# Altium PCB ESP8266_Project_PCB.PcbDoc
Units mil, origin at the board's own origin, x right, y up, seen from the top; angles counter-clockwise.
Board outline 6885 x 3273 mil, 2 copper layers (Top Layer, Bottom Layer); 39 components, 24 nets, 249 pads, 0 vias.
Unrouted connection lines stored in the file: 4.
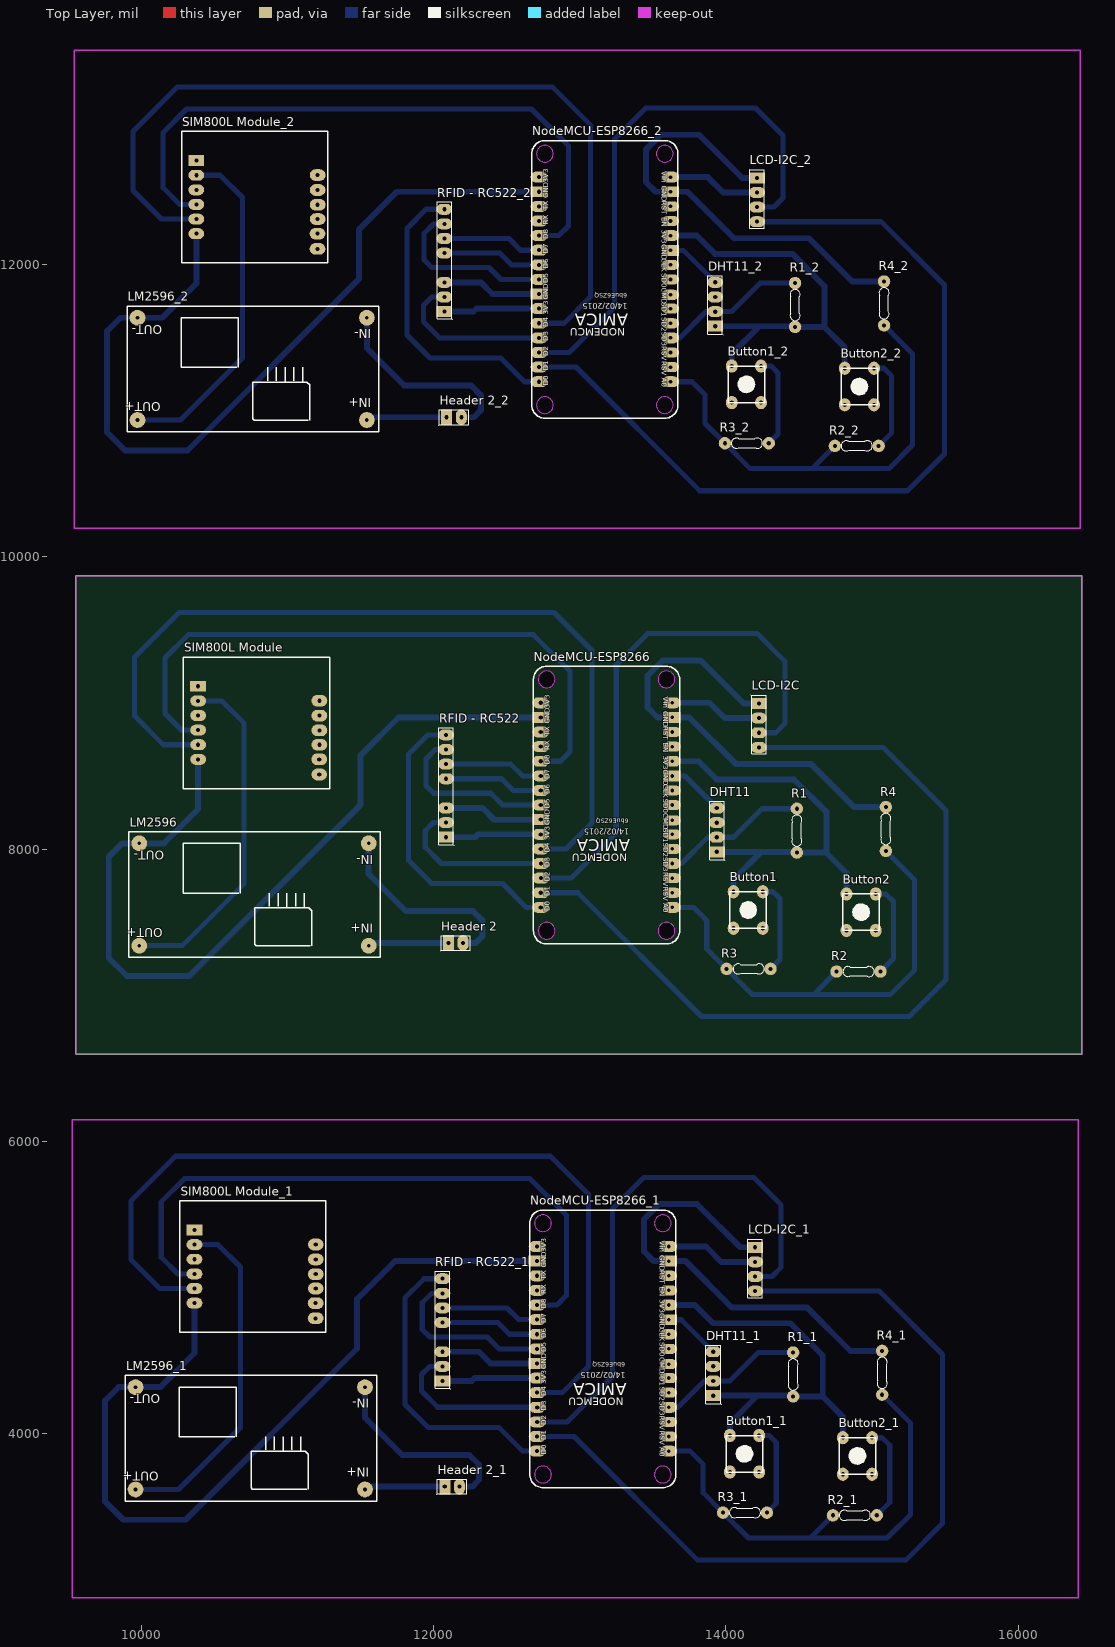
[diagram p0: Top Layer view]
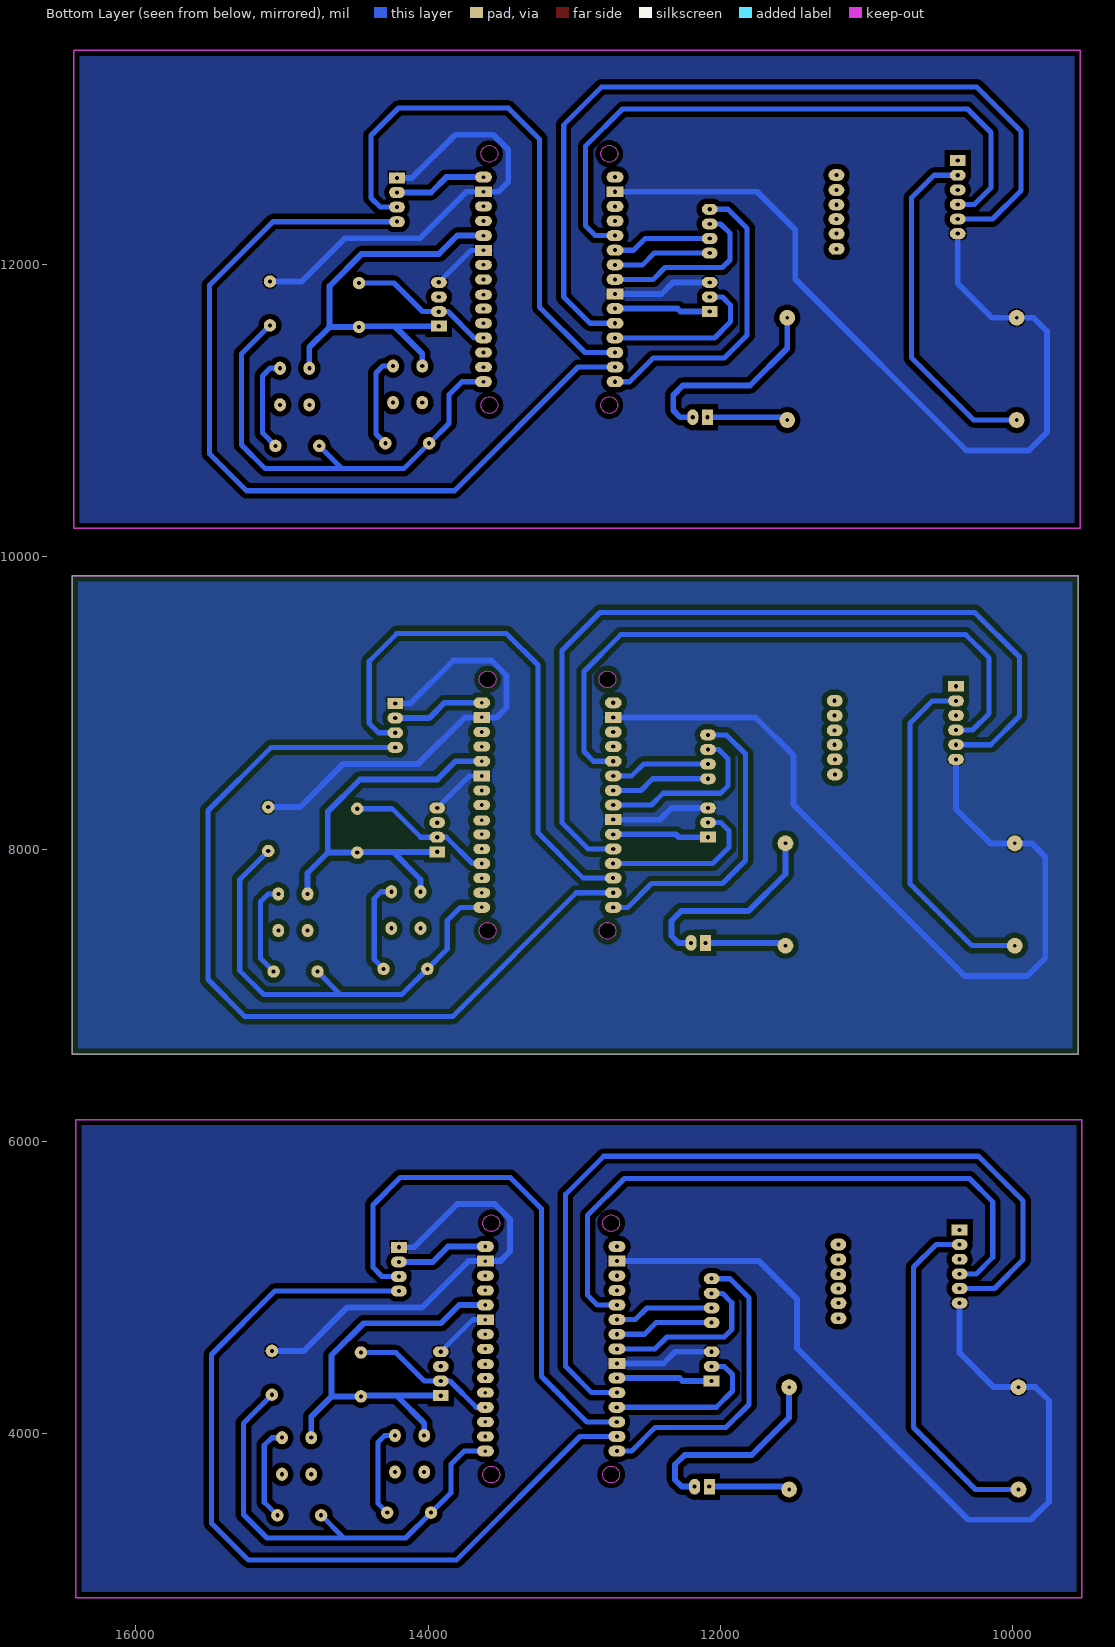
[diagram p1: Bottom Layer view, seen from below]

## Layer stack, top to bottom
Top Solder: solder mask 0.4, Solder Resist, Dk 3.5
Top Layer: signal copper 1.4
Dielectric 1: dielectric 12.6, FR-4, Dk 4.8
Bottom Layer: signal copper 1.4
Bottom Solder: solder mask 0.4, Solder Resist, Dk 3.5

## Board outline
9551,6598 16436,6598 16436,9871 9551,9871

## Design rules (kind name [scope] priority, off if disabled: settings)
Clearance [All] p1: gap=25 except(35: Arc-Poly Track-Poly SMDPad-Poly THPad-Poly Via-Poly Fill-Poly Poly-Poly)
PolygonConnect [All] p1: connectstyle=Relief reliefconductorwidth=10 reliefentries=4 polygonreliefangle="90 Angle" airgapwidth=10
RoutingVias [All] p1: holewidth=28 width=50 viastyle="Through Hole" minholewidth=28 minwidth=50 maxholewidth=28 maxwidth=50
SolderMaskExpansion [All] p1: expansion=4
Width [All] p1: maxlimit=40 minlimit=15 preferedwidth=15
30 further rules are at their usual default settings.

## Classes and differential pairs
component class ESP8266_Project_Schematic: Button1 Button2 DHT11 "Header 2" LCD-I2C LM2596 NodeMCU-ESP8266 R1 R2 R3 R4 "RFID - RC522" "SIM800L Module"

## Components (designator, comment, footprint, x,y, rotation, side; value= is the part's Value field where it differs from the comment)
Button1 "Tact Switch" SW/4/DIP/SMALL 14152,7584 r0 top
Button1_1 "Tact Switch" SW/4/DIP/SMALL 14127,3863 r0 top (schematic designator Button1)
Button1_2 "Tact Switch" SW/4/DIP/SMALL 14140,11181 r0 top (schematic designator Button1)
Button2 "Tact Switch" SW/4/DIP/SMALL 14925,7569 r0 top
Button2_1 "Tact Switch" SW/4/DIP/SMALL 14900,3848 r0 top (schematic designator Button2)
Button2_2 "Tact Switch" SW/4/DIP/SMALL 14913,11166 r0 top (schematic designator Button2)
DHT11 "DHT11" "Header 4"#1 13938,7982 r90 top
DHT11_1 "DHT11" "Header 4"#1 13913,4261 r90 top (schematic designator DHT11)
DHT11_2 "DHT11" "Header 4"#1 13926,11579 r90 top (schematic designator DHT11)
"Header 2" "Header 2" "Header 2" 12101,7359 r0 top
"Header 2_1" "Header 2" "Header 2" 12076,3638 r0 top (schematic designator "Header 2")
"Header 2_2" "Header 2" "Header 2" 12089,10956 r0 top (schematic designator "Header 2")
LCD-I2C "LCD-I2C" "Header 4"#2 14225,8997 r270 top
LCD-I2C_1 "LCD-I2C" "Header 4"#2 14200,5276 r270 top (schematic designator LCD-I2C)
LCD-I2C_2 "LCD-I2C" "Header 4"#2 14213,12594 r270 top (schematic designator LCD-I2C)
LM2596 "BUCK_LM2596" BUCK_LM2596 10785,7660 r180 top
LM2596_1 "BUCK_LM2596" BUCK_LM2596 10760,3939 r180 top (schematic designator LM2596)
LM2596_2 "BUCK_LM2596" BUCK_LM2596 10773,11257 r180 top (schematic designator LM2596)
NodeMCU-ESP8266 "NodeMCU V1.0 ESP-12E" "NodeMCU V1.0 ESP-12E" 13684,7356 r180 top
NodeMCU-ESP8266_1 "NodeMCU V1.0 ESP-12E" "NodeMCU V1.0 ESP-12E" 13659,3635 r180 top (schematic designator NodeMCU-ESP8266)
NodeMCU-ESP8266_2 "NodeMCU V1.0 ESP-12E" "NodeMCU V1.0 ESP-12E" 13672,10953 r180 top (schematic designator NodeMCU-ESP8266)
R1 "10K" "R 1/4W" 14485,8277 r270 top
R1_1 "10K" "R 1/4W" 14460,4556 r270 top (schematic designator R1)
R1_2 "10K" "R 1/4W" 14473,11874 r270 top (schematic designator R1)
R2 "20K" "R 1/4W" 14757,7163 r0 top
R2_1 "20K" "R 1/4W" 14732,3442 r0 top (schematic designator R2)
R2_2 "20K" "R 1/4W" 14745,10760 r0 top (schematic designator R2)
R3 "10K" "R 1/4W" 14005,7181 r0 top
R3_1 "10K" "R 1/4W" 13980,3460 r0 top (schematic designator R3)
R3_2 "10K" "R 1/4W" 13993,10778 r0 top (schematic designator R3)
R4 "10K" "R 1/4W" 15094,7988 r90 top
R4_1 "10K" "R 1/4W" 15069,4267 r90 top (schematic designator R4)
R4_2 "10K" "R 1/4W" 15082,11585 r90 top (schematic designator R4)
"RFID - RC522" "RFID - RC522" "Header 8" 12085,8082 r90 top
"RFID - RC522_1" "RFID - RC522" "Header 8" 12060,4361 r90 top (schematic designator "RFID - RC522")
"RFID - RC522_2" "RFID - RC522" "Header 8" 12073,11679 r90 top (schematic designator "RFID - RC522")
"SIM800L Module" "SIM800L Module" "SIM800L PINOUT" 10388,9115 r270 top
"SIM800L Module_1" "SIM800L Module" "SIM800L PINOUT" 10363,5394 r270 top (schematic designator "SIM800L Module")
"SIM800L Module_2" "SIM800L Module" "SIM800L PINOUT" 10376,12712 r270 top (schematic designator "SIM800L Module")

## Footprints (in the part's own frame and the unit in brackets; to place one, negate y for a bottom-side part, rotate by r counter-clockwise, add the part's x,y. Pads: shape width x height; smd on the part's side, far side on the other; paste and mask are expansions set on the pad)
BUCK_LM2596 [mil]
  round 108 hole 25: 1(-770,320) 2(-770,-380) 3(800,-380) 4(800,320)
  silkscreen extent -850,-460 870,400
"Header 2" [mil]
  rect 75x108 hole 28: 1(0,0)
  oval 75x108 hole 28: 2(100,0)
  silkscreen extent -55,-55 150,50, body extent -50,-50 150,50, height 350
"Header 4"#1 [mil]
  rect 75x108 hole 30: 1(0,0)
  oval 75x108 hole 30: 2(100,0) 3(200,0) 4(300,0)
  silkscreen extent -60,-55 345,50, body extent -50,-50 350,50, height 350
"Header 4"#2 [mil]
  rect 75x108 hole 28: 1(0,0)
  oval 75x108 hole 28: 2(100,0) 3(200,0) 4(300,0)
  silkscreen extent -60,-55 345,50, body extent -50,-50 350,50, height 350
"Header 8" [mil]
  rect 75x108 hole 28: 1(0,0)
  oval 75x108 hole 28: 2(100,0) 3(200,0) 5(400,0) 6(500,0) 7(600,0) 8(700,0)
  silkscreen extent -55,-55 750,50, body extent -50,-51 750,47, height 336
"NodeMCU V1.0 ESP-12E" [mil]
  round 115 hole 115 unplated paste-300 mask-300: 0(91,-86) 0(91,-1806) 0(911,-86) 0(911,-1806)
  oval 115x75 hole 25: 3V3(51,-1246) A0(51,-246) SD3(51,-546) VIN(51,-1646)
  oval 115x75 hole 28: 3V3(951,-746) 3V3(951,-1646) D0(951,-246) D1(951,-346) D2(950,-446) D3(950,-546) D4(951,-646) D5(951,-946) D6(951,-1046) D7(951,-1146) D8(951,-1246) RX(951,-1346) TX(951,-1446)
  oval 115x69 hole 25: CLK(51,-1046) CMD(51,-841) EN(51,-1346) RST(51,-1446) RSV(51,-346) RSV(51,-446) SD0(51,-946) SD1(51,-746) SD2(51,-646)
  rect 115x75 hole 25: GND(51,-1145) GND(51,-1546)
  rect 115x75 hole 28: GND(951,-846) GND(951,-1546)
  Keep-Out Layer circle w2: c911,-1806 r57.5
  Keep-Out Layer circle w2: c91,-1806 r57.5
  Keep-Out Layer circle w2: c911,-86 r57.5
  Keep-Out Layer circle w2: c91,-86 r57.5
  silkscreen extent 1,-1896 1001,4
"R 1/4W" [mil]
  round 85 hole 28: 1(0,0) 2(300,0)
  silkscreen extent 44,-35 257,35, body extent -12,-47 312,47, height 95
"SIM800L PINOUT" [mil]
  rect 75x108 hole 28: 1(0,0)
  oval 75x108 hole 28: 2(100,0) 3(200,0) 4(300,0) 5(400,0) 6(500,0)
  oval 80x108 hole 28: 7(604,829) 8(500,829) 9(400,830) 10(302,830) 11(201,830) 12(99,830)
  silkscreen extent -200,-100 700,900, body extent -55,-49 655,899, height 335
SW/4/DIP/SMALL [mil]
  oval 80x90 hole 28: 1(-100,125) 2(100,125) 3(100,-125) 4(-100,-125)
  silkscreen extent -125,-125 125,125, body extent -108,-162 130,142, height 197

## Part data
Button1 Button1_1 Button1_2 Button2 Button2_1 Button2_2: library part "SW SPST-4", "Tact switch 4 pin"
DHT11 DHT11_1 DHT11_2 LCD-I2C LCD-I2C_1 LCD-I2C_2: "Header, 4-Pin"
"Header 2" "Header 2_1" "Header 2_2": "Header, 2-Pin"
NodeMCU-ESP8266 NodeMCU-ESP8266_1 NodeMCU-ESP8266_2: "NodeMCU V1.0 ESP8266 (ESP-12E)"
R1 R1_1 R1_2 R2 R2_1 R2_2 R3 R3_1 R3_2 R4 R4_1 R4_2: library part Resistor, "Resistor"
"RFID - RC522" "RFID - RC522_1" "RFID - RC522_2": "Header, 8-Pin"
"SIM800L Module" "SIM800L Module_1" "SIM800L Module_2": "Header, 5-Pin, Dual row"

## Nets (pads, with @x,y where several pads share a name; then routed paths per layer and width w, separated by ;. In a path a pad name is that pad's centre, name@x,y a point inside that pad or via, vN(x,y) a via of type N, cw(c..) or ccw(c..) an arc to the next point about the centre after c; other vN are vias at no path point)
NetButton1_1: 
NetButton1_2: Button1.2 R3.2 | length 644
  Bottom Layer w35: Button1.2 14322,7709 14369,7662 14369,7245 R3.2
NetButton2_2: Button2.2 R2.2 | length 658.4
  Bottom Layer w35: Button2.2 15094,7694 15146,7642 15146,7252 R2.2
NetDHT11_1: 
NetDHT11_2: DHT11.2 NodeMCU-ESP8266.SD3 R1.1 | length 1007.3
  Bottom Layer w35: NodeMCU-ESP8266.SD3 13696,7902 13876,8082 DHT11.2 14051,8082 14246,8277 R1.1
NetDHT11_4: 
"NetHeader 2_1": "Header 2.1" LM2596.1 | length 553.9
  Bottom Layer w40: LM2596.1 11574,7359 12101,7359
"NetHeader 2_2": "Header 2.2" LM2596.2 | length 1379.4
  Bottom Layer w40: LM2596.2 11555,7831 11810,7576 12269,7576 12335,7510 12335,7406 12288,7359 12201,7359
NetLCD-I2C_1: 
NetLCD-I2C_2: LCD-I2C.2 NodeMCU-ESP8266.VIN | length 635.5
  Bottom Layer w40: NodeMCU-ESP8266.VIN 13888,9002 13993,8897 LCD-I2C.2
NetLCD-I2C_3: LCD-I2C.3 NodeMCU-ESP8266.D2 | length 3744
  Bottom Layer w35: NodeMCU-ESP8266.D2 12939,7802 13249,8112 13249,9261 13463,9475 14215,9475 14403,9287 14403,8860 14340,8797 LCD-I2C.3
NetLCD-I2C_4: LCD-I2C.4 NodeMCU-ESP8266.D1 | length 5846.2
  Bottom Layer w35: NodeMCU-ESP8266.D1 12986,7702 13832,6856 15255,6856 15507,7108 15507,8264 15074,8697 LCD-I2C.4
NetLM2596_3: 
NetLM2596_4: "SIM800L Module.2" LM2596.4 | length 2370
  Bottom Layer w35: LM2596.4 10279,7340 10703,7764 10703,8862 10550,9015 10388,9015
NetNodeMCU-ESP8266_3V3: "RFID - RC522.1" Button1.1 Button2.1 DHT11.1 NodeMCU-ESP8266.3V3 R1.2 | length 3575.9
  Bottom Layer w40: 12085,8082 12285,8082 12305,8102 NodeMCU-ESP8266.3V3@12733,8102 ; NodeMCU-ESP8266.3V3@13633,8602 13812,8602 13937,8477 14466,8477 14687,8256 14687,7977 14685,7977 ; DHT11.1 14241,7982 ; Button1.1 14052,7793 14241,7982 ; Button2.1 14825,7837 14685,7977 ; 14241,7982 14480,7982 R1.2 14685,7977
NetNodeMCU-ESP8266_A0: NodeMCU-ESP8266.A0 R2.1 R3.1 R4.1 | length 3200.5
  Bottom Layer w35: NodeMCU-ESP8266.A0 13780,7602 13869,7513 13869,7317 R3.1 14179,7007 15127,7007 15289,7169 15289,7793 R4.1 ; 14604,7010 R2.1
NetNodeMCU-ESP8266_D0: "RFID - RC522.8" NodeMCU-ESP8266.D0 | length 2075.8
  Bottom Layer w35: 12085,8782 11960,8782 11829,8651 11829,7922 11986,7765 12471,7765 12634,7602 NodeMCU-ESP8266.D0
NetNodeMCU-ESP8266_D3: "RFID - RC522.2" NodeMCU-ESP8266.D3 | length 1117.2
  Bottom Layer w35: 12085,8182 11998,8182 11942,8126 11942,8013 12053,7902 NodeMCU-ESP8266.D3
NetNodeMCU-ESP8266_D4: "SIM800L Module.5" NodeMCU-ESP8266.D4 | length 5887.4
  Bottom Layer w35: 10388,8715 10150,8715 9954,8911 9954,9315 10259,9620 12824,9620 13084,9360 13084,8181 12905,8002 NodeMCU-ESP8266.D4
NetNodeMCU-ESP8266_D5: "RFID - RC522.7" NodeMCU-ESP8266.D5 | length 1188.6
  Bottom Layer w35: 12085,8682 12011,8682 11947,8618 11947,8435 11999,8383 12391,8383 12472,8302 NodeMCU-ESP8266.D5
NetNodeMCU-ESP8266_D6: "RFID - RC522.5" NodeMCU-ESP8266.D6 | length 681.1
  Bottom Layer w35: 12085,8482 12464,8482 12544,8402 NodeMCU-ESP8266.D6
NetNodeMCU-ESP8266_D7: "RFID - RC522.6" NodeMCU-ESP8266.D7 | length 681.1
  Bottom Layer w35: 12085,8582 12527,8582 12607,8502 NodeMCU-ESP8266.D7
NetNodeMCU-ESP8266_D8: "SIM800L Module.4" NodeMCU-ESP8266.D8 | length 4373.2
  Bottom Layer w35: 10388,8815 10275,8815 10161,8929 10161,9308 10321,9468 12682,9468 12934,9216 12934,8668 12868,8602 NodeMCU-ESP8266.D8
NetNodeMCU-ESP8266_GND: "RFID - RC522.3" "SIM800L Module.6" DHT11.4 LCD-I2C.1 LM2596.3 NodeMCU-ESP8266.GND R4.2 | length 9852.3
  Bottom Layer w35: NodeMCU-ESP8266.GND@13633,8501 13719,8501 DHT11.4
  Bottom Layer w40: 10388,8615 10388,8274 10154,8040 LM2596.3 9869,8040 9777,7948 9777,7256 9901,7132 10328,7132 11500,8304 11500,8642 11760,8902 NodeMCU-ESP8266.GND@12733,8902 ; 12085,8282 12335,8282 12415,8202 NodeMCU-ESP8266.GND@12733,8202 ; LCD-I2C.1 14122,8997 13827,9292 13567,9292 13464,9189 13464,8969 13531,8902 13633,8902 13749,8902 14067,8584 14581,8584 14877,8288 R4.2
pads on no net: "Header 2_1.1" "Header 2_1.2" "Header 2_2.1" "Header 2_2.2" "RFID - RC522_1.1" "RFID - RC522_1.2" "RFID - RC522_1.3" "RFID - RC522_1.5" "RFID - RC522_1.6" "RFID - RC522_1.7" "RFID - RC522_1.8" "RFID - RC522_2.1" "RFID - RC522_2.2" "RFID - RC522_2.3" "RFID - RC522_2.5" "RFID - RC522_2.6" "RFID - RC522_2.7" "RFID - RC522_2.8" "SIM800L Module.1" "SIM800L Module.3" "SIM800L Module.7" "SIM800L Module.8" "SIM800L Module.9" "SIM800L Module.10" "SIM800L Module.11" "SIM800L Module.12" "SIM800L Module_1.1" "SIM800L Module_1.2" "SIM800L Module_1.3" "SIM800L Module_1.4" "SIM800L Module_1.5" "SIM800L Module_1.6" "SIM800L Module_1.7" "SIM800L Module_1.8" "SIM800L Module_1.9" "SIM800L Module_1.10" "SIM800L Module_1.11" "SIM800L Module_1.12" "SIM800L Module_2.1" "SIM800L Module_2.2" "SIM800L Module_2.3" "SIM800L Module_2.4" "SIM800L Module_2.5" "SIM800L Module_2.6" "SIM800L Module_2.7" "SIM800L Module_2.8" "SIM800L Module_2.9" "SIM800L Module_2.10" "SIM800L Module_2.11" "SIM800L Module_2.12" Button1.3 Button1.4 Button1_1.1 Button1_1.2 Button1_1.3 Button1_1.4 Button1_2.1 Button1_2.2 Button1_2.3 Button1_2.4 Button2.3 Button2.4 Button2_1.1 Button2_1.2 Button2_1.3 Button2_1.4 Button2_2.1 Button2_2.2 Button2_2.3 Button2_2.4 DHT11.3 DHT11_1.1 DHT11_1.2 DHT11_1.3 DHT11_1.4 DHT11_2.1 DHT11_2.2 DHT11_2.3 DHT11_2.4 LCD-I2C_1.1 LCD-I2C_1.2 LCD-I2C_1.3 LCD-I2C_1.4 LCD-I2C_2.1 LCD-I2C_2.2 LCD-I2C_2.3 LCD-I2C_2.4 LM2596_1.1 LM2596_1.2 LM2596_1.3 LM2596_1.4 LM2596_2.1 LM2596_2.2 LM2596_2.3 LM2596_2.4 NodeMCU-ESP8266.0 NodeMCU-ESP8266.CLK NodeMCU-ESP8266.CMD NodeMCU-ESP8266.EN NodeMCU-ESP8266.RST NodeMCU-ESP8266.RSV NodeMCU-ESP8266.RX NodeMCU-ESP8266.SD0 NodeMCU-ESP8266.SD1 NodeMCU-ESP8266.SD2 NodeMCU-ESP8266.TX NodeMCU-ESP8266_1.0 NodeMCU-ESP8266_1.3V3 NodeMCU-ESP8266_1.A0 NodeMCU-ESP8266_1.CLK NodeMCU-ESP8266_1.CMD NodeMCU-ESP8266_1.D0 NodeMCU-ESP8266_1.D1 NodeMCU-ESP8266_1.D2 NodeMCU-ESP8266_1.D3 NodeMCU-ESP8266_1.D4 NodeMCU-ESP8266_1.D5 NodeMCU-ESP8266_1.D6 NodeMCU-ESP8266_1.D7 NodeMCU-ESP8266_1.D8 NodeMCU-ESP8266_1.EN NodeMCU-ESP8266_1.GND NodeMCU-ESP8266_1.RST NodeMCU-ESP8266_1.RSV NodeMCU-ESP8266_1.RX NodeMCU-ESP8266_1.SD0 NodeMCU-ESP8266_1.SD1 NodeMCU-ESP8266_1.SD2 NodeMCU-ESP8266_1.SD3 NodeMCU-ESP8266_1.TX NodeMCU-ESP8266_1.VIN NodeMCU-ESP8266_2.0 NodeMCU-ESP8266_2.3V3 NodeMCU-ESP8266_2.A0 NodeMCU-ESP8266_2.CLK NodeMCU-ESP8266_2.CMD NodeMCU-ESP8266_2.D0 NodeMCU-ESP8266_2.D1 NodeMCU-ESP8266_2.D2 NodeMCU-ESP8266_2.D3 NodeMCU-ESP8266_2.D4 NodeMCU-ESP8266_2.D5 NodeMCU-ESP8266_2.D6 NodeMCU-ESP8266_2.D7 NodeMCU-ESP8266_2.D8 NodeMCU-ESP8266_2.EN NodeMCU-ESP8266_2.GND NodeMCU-ESP8266_2.RST NodeMCU-ESP8266_2.RSV NodeMCU-ESP8266_2.RX NodeMCU-ESP8266_2.SD0 NodeMCU-ESP8266_2.SD1 NodeMCU-ESP8266_2.SD2 NodeMCU-ESP8266_2.SD3 NodeMCU-ESP8266_2.TX NodeMCU-ESP8266_2.VIN R1_1.1 R1_1.2 R1_2.1 R1_2.2 R2_1.1 R2_1.2 R2_2.1 R2_2.2 R3_1.1 R3_1.2 R3_2.1 R3_2.2 R4_1.1 R4_1.2 R4_2.1 R4_2.2
copper on no net: | length 98943.8
  Bottom Layer w35: 9960,3619 10254,3619 10678,4043 10678,5141 10525,5294 10363,5294 ; 9973,10937 10267,10937 10691,11361 10691,12459 10538,12612 10376,12612 ; 10363,4994 10125,4994 9929,5190 9929,5594 10234,5899 12799,5899 13059,5639 13059,4460 12880,4281 12708,4281 ; 10363,5094 10250,5094 10136,5208 10136,5587 10296,5747 12657,5747 12909,5495 12909,4947 12843,4881 12708,4881 ; 10376,12312 10138,12312 9942,12508 9942,12912 10247,13217 12812,13217 13072,12957 13072,11778 12893,11599 12721,11599 ; 10376,12412 10263,12412 10149,12526 10149,12905 10309,13065 12670,13065 12922,12813 12922,12265 12856,12199 12721,12199 ; 12060,4461 11973,4461 11917,4405 11917,4292 12028,4181 12709,4181 ; 12060,4761 12439,4761 12519,4681 12708,4681 ; 12060,4861 12502,4861 12582,4781 12708,4781 ; 12060,4961 11986,4961 11922,4897 11922,4714 11974,4662 12366,4662 12447,4581 12708,4581 ; 12060,5061 11935,5061 11804,4930 11804,4201 11961,4044 12446,4044 12609,3881 12708,3881 ; 12073,11779 11986,11779 11930,11723 11930,11610 12041,11499 12722,11499 ; 12073,12079 12452,12079 12532,11999 12721,11999 ; 12073,12179 12515,12179 12595,12099 12721,12099 ; 12073,12279 11999,12279 11935,12215 11935,12032 11987,11980 12379,11980 12460,11899 12721,11899 ; 12073,12379 11948,12379 11817,12248 11817,11519 11974,11362 12459,11362 12622,11199 12721,11199 ; 12708,3981 12961,3981 13807,3135 15230,3135 15482,3387 15482,4543 15049,4976 14200,4976 ; 12709,4081 12914,4081 13224,4391 13224,5540 13438,5754 14190,5754 14378,5566 14378,5139 14315,5076 14200,5076 ; 12721,11299 12974,11299 13820,10453 15243,10453 15495,10705 15495,11861 15062,12294 14213,12294 ; 12722,11399 12927,11399 13237,11709 13237,12858 13451,13072 14203,13072 14391,12884 14391,12457 14328,12394 14213,12394 ; 13608,3881 13755,3881 13844,3792 13844,3596 13980,3460 14154,3286 15102,3286 15264,3448 15264,4072 15069,4267 ; 13608,4181 13671,4181 13851,4361 13913,4361 14026,4361 14221,4556 14460,4556 ; 13608,4780 13694,4780 13913,4561 ; 13621,11199 13768,11199 13857,11110 13857,10914 13993,10778 14167,10604 15115,10604 15277,10766 15277,11390 15082,11585 ; 13621,11499 13684,11499 13864,11679 13926,11679 14039,11679 14234,11874 14473,11874 ; 13621,12098 13707,12098 13926,11879 ; 14227,3988 14297,3988 14344,3941 14344,3524 14280,3460 ; 14240,11306 14310,11306 14357,11259 14357,10842 14293,10778 ; 14579,3289 14732,3442 ; 14592,10607 14745,10760 ; 15000,3973 15069,3973 15121,3921 15121,3531 15032,3442 ; 15013,11291 15082,11291 15134,11239 15134,10849 15045,10760
  Bottom Layer w40: 10363,4894 10363,4553 10129,4319 9960,4319 9844,4319 9752,4227 9752,3535 9876,3411 10303,3411 11475,4583 11475,4921 11735,5181 12708,5181 ; 10376,12212 10376,11871 10142,11637 9973,11637 9857,11637 9765,11545 9765,10853 9889,10729 10316,10729 11488,11901 11488,12239 11748,12499 12721,12499 ; 11530,3619 11549,3638 12076,3638 ; 11530,4319 11530,4110 11785,3855 12244,3855 12310,3789 12310,3685 12263,3638 12176,3638 ; 11543,10937 11562,10956 12089,10956 ; 11543,11637 11543,11428 11798,11173 12257,11173 12323,11107 12323,11003 12276,10956 12189,10956 ; 12060,4361 12260,4361 12280,4381 12708,4381 ; 12060,4561 12310,4561 12390,4481 12708,4481 ; 12073,11679 12273,11679 12293,11699 12721,11699 ; 12073,11879 12323,11879 12403,11799 12721,11799 ; 13608,4881 13787,4881 13912,4756 14441,4756 14662,4535 14662,4256 14660,4256 ; 13608,5281 13863,5281 13968,5176 14200,5176 ; 13621,12199 13800,12199 13925,12074 14454,12074 14675,11853 14675,11574 14673,11574 ; 13621,12599 13876,12599 13981,12494 14213,12494 ; 13913,4261 14216,4261 ; 13926,11579 14229,11579 ; 14027,3988 14027,4072 14216,4261 ; 14040,11306 14040,11390 14229,11579 ; 14200,5276 14097,5276 13802,5571 13542,5571 13439,5468 13439,5248 13506,5181 13608,5181 13724,5181 14042,4863 14556,4863 14852,4567 15069,4567 ; 14213,12594 14110,12594 13815,12889 13555,12889 13452,12786 13452,12566 13519,12499 13621,12499 13737,12499 14055,12181 14569,12181 14865,11885 15082,11885 ; 14800,3973 14800,4116 14660,4256 ; 14813,11291 14813,11434 14673,11574 ; 14216,4261 14455,4261 14460,4256 14660,4256 ; 14229,11579 14468,11579 14473,11574 14673,11574

## Polygon pours and split planes (outlines as drawn)
no net on Bottom Layer "GND" (solid, remove dead copper, pour order 33): 9539,10195 16424,10195 16424,13468 9539,13468
no net on Bottom Layer "GND" (solid, remove dead copper, pour order 31): 9526,2877 16411,2877 16411,6150 9526,6150
NetNodeMCU-ESP8266_GND on Bottom Layer "GND" (solid, remove dead copper, pour order 30): 9551,6598 16436,6598 16436,9871 9551,9871

## Keep-outs
Keep-Out Layer:
  lines w9.84: 9526,2877 9526,6150 16411,6150 16411,2877 9526,2877 ; 9539,10195 9539,13468 16424,13468 16424,10195 9539,10195 ; 9551,6598 16436,6598 16436,9871 9551,9871 9551,6598

## Text inside footprints (layer, text, board x,y; h text height)
LM2596: Top Overlay "IN+" at 11585,7490 h60 r180; Top Overlay "IN-" at 11585,7960 h60 r180; Top Overlay "OUT+" at 10145,7460 h60 r180; Top Overlay "OUT-" at 10155,7990 h60 r180
LM2596_1: Top Overlay "IN+" at 11560,3769 h60 r180; Top Overlay "IN-" at 11560,4239 h60 r180; Top Overlay "OUT+" at 10120,3739 h60 r180; Top Overlay "OUT-" at 10130,4269 h60 r180
LM2596_2: Top Overlay "IN+" at 11573,11087 h60 r180; Top Overlay "IN-" at 11573,11557 h60 r180; Top Overlay "OUT+" at 10133,11057 h60 r180; Top Overlay "OUT-" at 10143,11587 h60 r180
NodeMCU-ESP8266: Top Overlay "14/02/2015" at 13339,8154 h69 r180; Top Overlay "AMICA" at 13345,8095 h140 r180; Top Overlay "NODEMCU" at 13324,7985 h90 r180; Top Overlay "6buE6ZSQ" at 13335,8209 h30 r180; Top Overlay "CLK" at 13558,8446 h60 r270; Top Overlay "SD0" at 13558,8345.57 h60 r270; Top Overlay "SD1" at 13558,8144.71 h60 r270; Top Overlay "SD2" at 13558,8044.29 h60 r270; Top Overlay "SD3" at 13558,7943.86 h60 r270; Top Overlay "RSV" at 13558,7843.43 h60 r270; Top Overlay "RSV" at 13558,7743 h60 r270; Top Overlay "A0" at 13558,7629 h60 r270; Top Overlay "D5" at 12808,8277 h60 r90; Top Overlay "GND" at 12808,8163 h60 r90; Top Overlay "3V3" at 12808,8061.01 h60 r90; Top Overlay "D4" at 12808,7976 h60 r90; Top Overlay "D3" at 12808,7877.58 h60 r90; Top Overlay "D2" at 12808,7777.58 h60 r90; Top Overlay "D1" at 12808,7677.35 h60 r90; Top Overlay "D0" at 12808,7576 h60 r90; Top Overlay "CMD" at 13558,8245.14 h60 r270; Top Overlay "D6" at 12808,8376.12 h60 r90; Top Overlay "3V3" at 12808,8962 h60 r90; Top Overlay "GND" at 12808,8858.2 h60 r90; Top Overlay "TX" at 12808,8775 h60 r90; Top Overlay "RX" at 12808,8676.06 h60 r90; Top Overlay "D8" at 12808,8577.11 h60 r90; Top Overlay "D7" at 12808,8477.23 h60 r90; Top Overlay "Vin" at 13558,9043 h60 r270; Top Overlay "GND" at 13558,8943 h60 r270; Top Overlay "RST" at 13558,8840 h60 r270; Top Overlay "EN" at 13558,8728 h60 r270; Top Overlay "3V3" at 13558,8641 h60 r270; Top Overlay "GND" at 13558,8544 h60 r270
NodeMCU-ESP8266_1: Top Overlay "14/02/2015" at 13314,4433 h69 r180; Top Overlay "AMICA" at 13320,4374 h140 r180; Top Overlay "NODEMCU" at 13299,4264 h90 r180; Top Overlay "6buE6ZSQ" at 13310,4488 h30 r180; Top Overlay "CLK" at 13533,4725 h60 r270; Top Overlay "SD0" at 13533,4624.57 h60 r270; Top Overlay "SD1" at 13533,4423.71 h60 r270; Top Overlay "SD2" at 13533,4323.29 h60 r270; Top Overlay "SD3" at 13533,4222.86 h60 r270; Top Overlay "RSV" at 13533,4122.43 h60 r270; Top Overlay "RSV" at 13533,4022 h60 r270; Top Overlay "A0" at 13533,3908 h60 r270; Top Overlay "D5" at 12783,4556 h60 r90; Top Overlay "GND" at 12783,4442 h60 r90; Top Overlay "3V3" at 12783,4340.01 h60 r90; Top Overlay "D4" at 12783,4255 h60 r90; Top Overlay "D3" at 12783,4156.58 h60 r90; Top Overlay "D2" at 12783,4056.58 h60 r90; Top Overlay "D1" at 12783,3956.35 h60 r90; Top Overlay "D0" at 12783,3855 h60 r90; Top Overlay "CMD" at 13533,4524.14 h60 r270; Top Overlay "D6" at 12783,4655.12 h60 r90; Top Overlay "3V3" at 12783,5241 h60 r90; Top Overlay "GND" at 12783,5137.2 h60 r90; Top Overlay "TX" at 12783,5054 h60 r90; Top Overlay "RX" at 12783,4955.06 h60 r90; Top Overlay "D8" at 12783,4856.11 h60 r90; Top Overlay "D7" at 12783,4756.23 h60 r90; Top Overlay "Vin" at 13533,5322 h60 r270; Top Overlay "GND" at 13533,5222 h60 r270; Top Overlay "RST" at 13533,5119 h60 r270; Top Overlay "EN" at 13533,5007 h60 r270; Top Overlay "3V3" at 13533,4920 h60 r270; Top Overlay "GND" at 13533,4823 h60 r270
NodeMCU-ESP8266_2: Top Overlay "14/02/2015" at 13327,11751 h69 r180; Top Overlay "AMICA" at 13333,11692 h140 r180; Top Overlay "NODEMCU" at 13312,11582 h90 r180; Top Overlay "6buE6ZSQ" at 13323,11806 h30 r180; Top Overlay "CLK" at 13546,12043 h60 r270; Top Overlay "SD0" at 13546,11942.57 h60 r270; Top Overlay "SD1" at 13546,11741.71 h60 r270; Top Overlay "SD2" at 13546,11641.29 h60 r270; Top Overlay "SD3" at 13546,11540.86 h60 r270; Top Overlay "RSV" at 13546,11440.43 h60 r270; Top Overlay "RSV" at 13546,11340 h60 r270; Top Overlay "A0" at 13546,11226 h60 r270; Top Overlay "D5" at 12796,11874 h60 r90; Top Overlay "GND" at 12796,11760 h60 r90; Top Overlay "3V3" at 12796,11658.01 h60 r90; Top Overlay "D4" at 12796,11573 h60 r90; Top Overlay "D3" at 12796,11474.58 h60 r90; Top Overlay "D2" at 12796,11374.58 h60 r90; Top Overlay "D1" at 12796,11274.35 h60 r90; Top Overlay "D0" at 12796,11173 h60 r90; Top Overlay "CMD" at 13546,11842.14 h60 r270; Top Overlay "D6" at 12796,11973.12 h60 r90; Top Overlay "3V3" at 12796,12559 h60 r90; Top Overlay "GND" at 12796,12455.2 h60 r90; Top Overlay "TX" at 12796,12372 h60 r90; Top Overlay "RX" at 12796,12273.06 h60 r90; Top Overlay "D8" at 12796,12174.11 h60 r90; Top Overlay "D7" at 12796,12074.23 h60 r90; Top Overlay "Vin" at 13546,12640 h60 r270; Top Overlay "GND" at 13546,12540 h60 r270; Top Overlay "RST" at 13546,12437 h60 r270; Top Overlay "EN" at 13546,12325 h60 r270; Top Overlay "3V3" at 13546,12238 h60 r270; Top Overlay "GND" at 13546,12141 h60 r270